# Altium PCB PowerBoardPCB.PcbDoc
Units mm, origin at the board's own origin, x right, y up, seen from the top; angles counter-clockwise.
Board outline 40 x 50 mm, 2 copper layers (Top Layer, Bottom Layer); 13 components, 14 nets, 46 pads, 0 vias.
Unrouted connection lines stored in the file: 1.
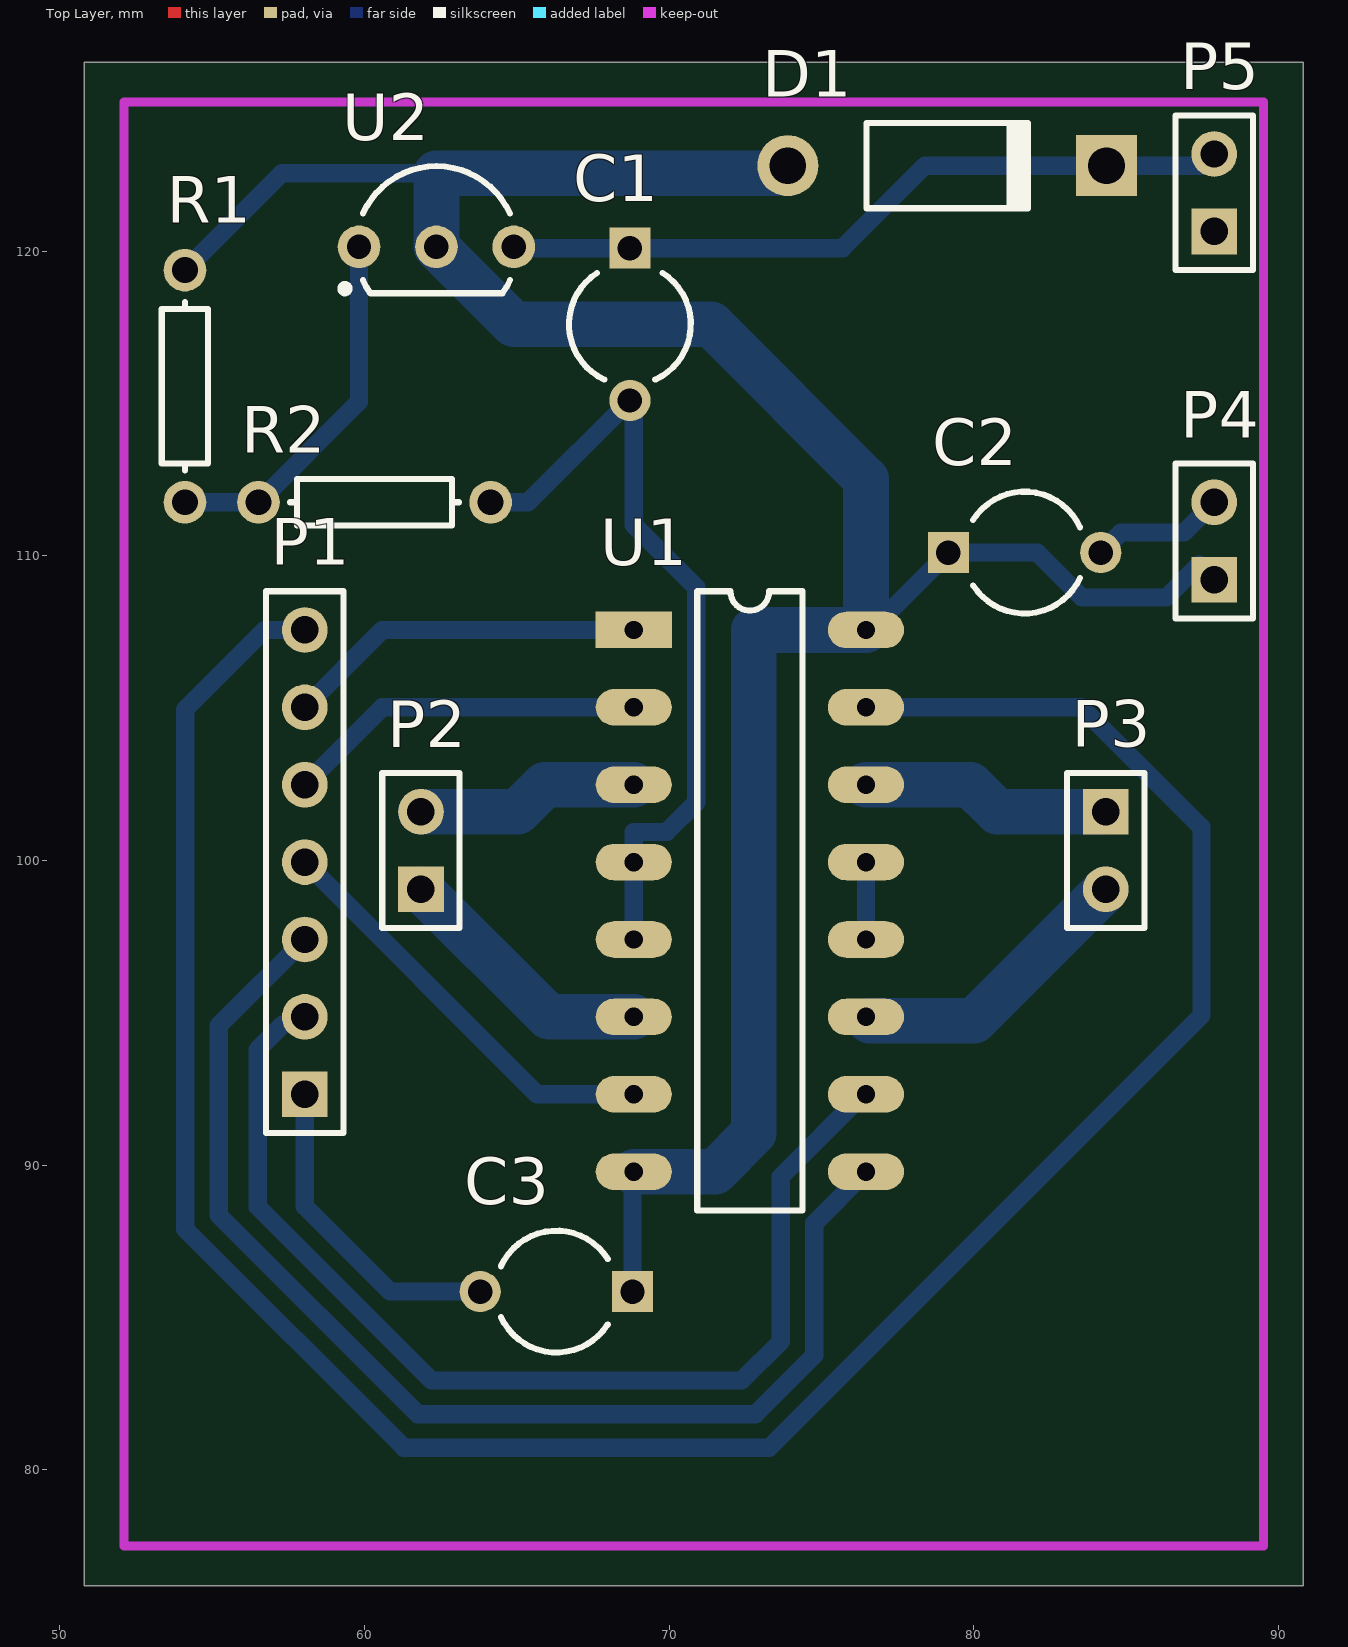
[diagram p0: Top Layer view]
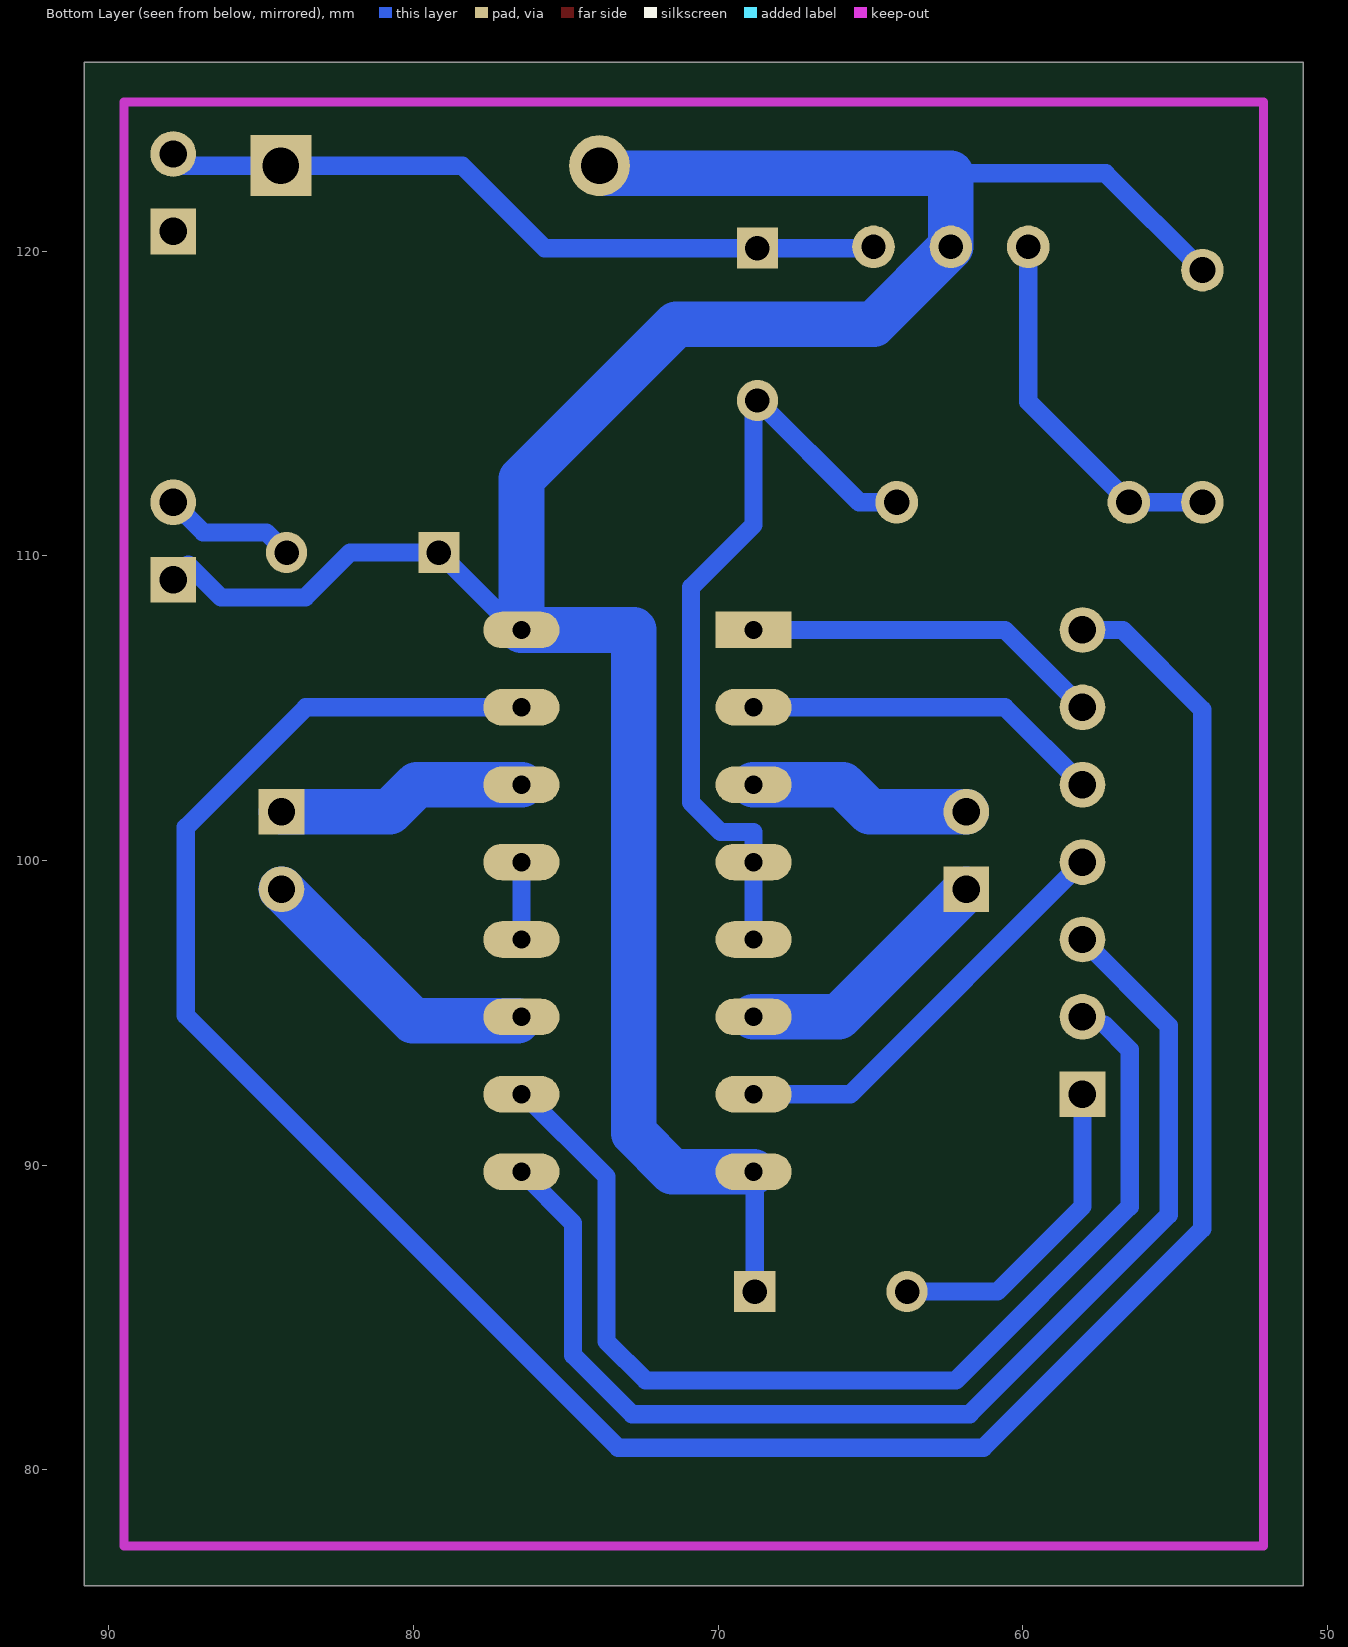
[diagram p1: Bottom Layer view, seen from below]

## Layer stack, top to bottom
Top Solder: solder mask 0.0102, Solder Resist, Dk 3.5
Top Layer: signal copper 0.0356
Dielectric 1: dielectric 0.32, FR-4, Dk 4.8
Bottom Layer: signal copper 0.0356
Bottom Solder: solder mask 0.0102, Solder Resist, Dk 3.5

## Board outline
50.8,76.2 90.8,76.2 90.8,126.2 50.8,126.2

## Design rules (kind name [scope] priority, off if disabled: settings)
Clearance [All] p1: gap=0.5
PolygonConnect [All] p1: connectstyle=Relief reliefconductorwidth=0.254 reliefentries=4 polygonreliefangle="90 Angle" airgapwidth=0.254
RoomDefinition PowerBoardSchematic [InComponentClass('PowerBoardSchematic')] p1: confinementstyle=ConfineIn formatcopy=TRUE lockcomponents=FALSE outline 91.948,77.724 165.481,77.724 165.481,101.092 91.948,101.092
RoutingVias [All] p1: holewidth=0.8 width=1.6 viastyle="Through Hole" minholewidth=0.711 minwidth=1.27 maxholewidth=0.711 maxwidth=1.27
SolderMaskExpansion [All] p1: expansion=0.102
Width [All] p1: maxlimit=0.6 minlimit=0.6 preferedwidth=0.6
30 further rules are at their usual default settings.

## Components (designator, comment, footprint, x,y, rotation, side; value= is the part's Value field where it differs from the comment)
C1 "0.1uF" CAPR5-4X5 68.707,117.602 r270 top
C2 "0.1uF" CAPR5-4X5 81.661,110.109 r0 top
C3 "0.1uF" CAPR5-4X5 66.294,85.852 r180 top
D1 "Diode 1N4002" DO-41 79.121,122.809 r0 top
P1 "POWERBOARDHEADER" HDR1X7 58.039,92.329 r90 top
P2 "LEFT_MOTOR_CONNECTOR" HDR1X2 61.849,99.06 r90 top
P3 "RIGHT_MOTOR_CONNECTOR" HDR1X2 84.328,101.6 r270 top
P4 "V_EXT_CONNECTOR" HDR1X2 87.884,109.22 r90 top
P5 "BAT_CONNECTOR" HDR1X2 87.884,120.65 r90 top
R1 "1K3" AXIAL-0.3 54.102,115.57 r90 top
R2 "3K9" AXIAL-0.3 60.325,111.76 r180 top
U1 "L293DNE Motor Driver" "DIP16 (NE)" 68.834,107.569 r0 top
U2 "LM317LCLPR" LP3 62.357,120.142 r270 top

## Footprints (in the part's own frame and the unit in brackets; to place one, negate y for a bottom-side part, rotate by r counter-clockwise, add the part's x,y. Pads: shape width x height; smd on the part's side, far side on the other; paste and mask are expansions set on the pad)
AXIAL-0.3 [mm] "Axial Device, Thru-Hole; 2 Leads; 0.3 in Pin Spacing"
  round 1.4 hole 0.85: 1(-3.81,0) 2(3.81,0)
  silkscreen extent -2.77,-0.76 2.77,0.76
CAPR5-4X5 [mm] "Capacitor; 2 Leads"
  rect 1.35x1.35 hole 0.8: 1(-2.5,0)
  round 1.35 hole 0.8: 2(2.5,0)
  silkscreen extent -1.69,-2 1.82,2
"DIP16 (NE)" [mm]
  rect 2.5x1.2 hole 0.6: 1(0,0)
  oval 2.5x1.2 hole 0.6: 2(0,-2.54) 3(0,-5.08) 4(0,-7.62) 5(0,-10.16) 6(0,-12.7) 7(0,-15.24) 8(0,-17.78) 9(7.62,-17.78) 10(7.62,-15.24) 11(7.62,-12.7) 12(7.62,-10.16) 13(7.62,-7.62) 14(7.62,-5.08) 15(7.62,-2.54) 16(7.62,0)
  silkscreen extent 2.08,-19.05 5.54,1.27
DO-41 [mm] "Diode, Axial; Body 5.2 x 2.7 mm (LxDia. max), Lead Dia. 0.86 mm (max)"
  round 2 hole 1.2: 1(-5.23,0)
  rect 2x2 hole 1.2: 2(5.23,0)
  silkscreen extent -2.65,-1.4 2.75,1.4
HDR1X2 [mm] "Connector; Header; 2 Position"
  rect 1.5x1.5 hole 0.9: 1(0,0)
  round 1.5 hole 0.9: 2(2.54,0)
  silkscreen extent -1.27,-1.27 3.81,1.27
HDR1X7 [mm] "Connector; Header; 7 Position"
  rect 1.5x1.5 hole 0.9: 1(0,0)
  round 1.5 hole 0.9: 2(2.54,0) 3(5.08,0) 4(7.62,0) 5(10.16,0) 6(12.7,0) 7(15.24,0)
  silkscreen extent -1.27,-1.27 16.51,1.27
LP3 [mm] "TO, Flat Index; 3 In-Line, Formed Axial Leads; Body Dia. 4.8mm; Leads 0.56 x 0.41 mm (max)"
  round 1.4 hole 0.8: 1(0,-2.54) 2(0,0) 3(0,2.54)
  silkscreen extent -2.65,-3.13 1.52,2.41, body extent -2.66,-2.66 1.52,2.66, height 9.33

## Part data
C1 C2 C3: library part Cap2, "Capacitor"
D1: "1 Amp General Purpose Rectifier"
P1: library part "Header 7", "Header, 7-Pin"
P2 P3 P4 P5: library part "Header 2", "Header, 2-Pin"
R1 R2: library part Res1, "Resistor"
U1: library part L293DNE, "TI L293DNE Quad H-bridge Motor Driver"
U2: library part CMP-0324-00087-2, "Adjustable Regulator with 3.7 to 38 V Input and 1.2 to 32 V Output, 0 to 125 degC, 3-Pin TO-92 (LP), Pb-Free (RoHS)"

## Nets (pads, with @x,y where several pads share a name; then routed paths per layer and width w, separated by ;. In a path a pad name is that pad's centre, name@x,y a point inside that pad or via, vN(x,y) a via of type N, cw(c..) or ccw(c..) an arc to the next point about the centre after c; other vN are vias at no path point)
6V: C2.1 C3.1 D1.1 P4.1 R1.2 U1.8 U1.16 U2.2 | length 87.5
  Bottom Layer w0.6: R1.2 57.277,122.555 62.357,122.555 ; C3.1 68.794,89.749 U1.8 ; D1.1@73.637,122.555 D1.1 ; U1.16 76.621,107.569 C2.1 82.075,110.109 83.55,108.634 86.314,108.634 P4.1@87.392,109.712
  Bottom Layer w1.5: U1.8 71.501,89.789 72.771,91.059 72.771,107.569 U1.16 76.454,112.522 71.374,117.602 64.897,117.602 U2.2 62.357,122.555 D1.1@73.637,122.555
GND: C1.2 C2.2 C3.2 P1.1 P4.2 P5.1 R2.1 U1.4 U1.5 U1.12 U1.13 | length 43.6
  Bottom Layer w0.6: P1.1 58.039,88.646 60.833,85.852 C3.2 ; R2.1 65.365,111.76 C1.2 68.834,114.975 68.834,111.019 70.884,108.969 70.884,101.909 69.914,100.939 68.834,100.939 U1.4 U1.5 ; U1.12 U1.13 ; C2.2 84.822,110.77 86.894,110.77 P4.2
LEFT_EN: P1.6 U1.1 | length 11.8
  Bottom Layer w0.6: P1.6 60.579,107.569 U1.1
MOTORSIG_LF: P1.5 U1.2 | length 11.8
  Bottom Layer w0.6: P1.5 60.579,105.029 U1.2
MOTORSIG_LR: P1.4 U1.7 | length 14
  Bottom Layer w0.6: P1.4 65.659,92.329 U1.7
MOTORSIG_RF: P1.7 U1.15 | length 83.1
  Bottom Layer w0.6: P1.7 56.717,107.569 54.109,104.961 54.109,87.909 61.287,80.731 73.282,80.731 87.467,94.916 87.467,101.092 83.53,105.029 U1.15
MOTORSIG_RR: P1.2 U1.10 | length 35.8
  Bottom Layer w0.6: 57.313,94.615 56.489,93.791 56.489,88.64 62.198,82.931 72.371,82.931 73.66,84.22 73.66,89.625 76.364,92.329 U1.10@76.544,92.329
NetP2_1: P2.1 U1.6 | length 8.7
  Bottom Layer w1.5: P2.1 66.04,94.869 U1.6
NetP2_2: P2.2 U1.3 | length 7.4
  Bottom Layer w1.5: P2.2 65.024,101.6 65.913,102.489 U1.3
NetP3_1: P3.1 U1.14 | length 8.2
  Bottom Layer w1.5: U1.14 79.883,102.489 80.772,101.6 P3.1
NetP3_2: P3.2 U1.11 | length 9.5
  Bottom Layer w1.5: U1.11@76.581,94.742 80.01,94.742 P3.2
NetR1_1: R1.1 R2.2 U2.1 | length 12.2
  Bottom Layer w0.6: R1.1 R2.2 59.817,115.062 U2.1
RIGHT_EN: P1.3 U1.9 | length 40
  Bottom Layer w0.6: P1.3 55.209,94.579 55.209,88.365 61.743,81.831 72.827,81.831 74.76,83.764 74.76,88.095 U1.9
VBAT: C1.1 D1.2 P5.2 U2.3 | length 23.7
  Bottom Layer w0.6: U2.3@64.937,120.102 C1.1 75.692,120.102 78.399,122.809 D1.2 P5.2@87.503,122.809

## Keep-outs
Keep-Out Layer:
  lines w0.3: 52.1,77.5 89.5,77.5 89.5,124.9 52.1,124.9 52.1,77.5

## Silkscreen, mask and mechanical layers (free items; w line width, h text height)
Drill Drawing:
  text ".LEGEND" at 95.88,81.28 h1.52
  text "Drill Drawing." at 95.88,78.74 h1.52

## Dimensions
52.1,77.5 to 89.5,77.5 on Mechanical 1
52.1,77.5 to 52.1,124.9 on Mechanical 1